# EAGLE board WS2812B-Breakout-Panel-v11 (EAGLE 6.6.0), part 1 of 2
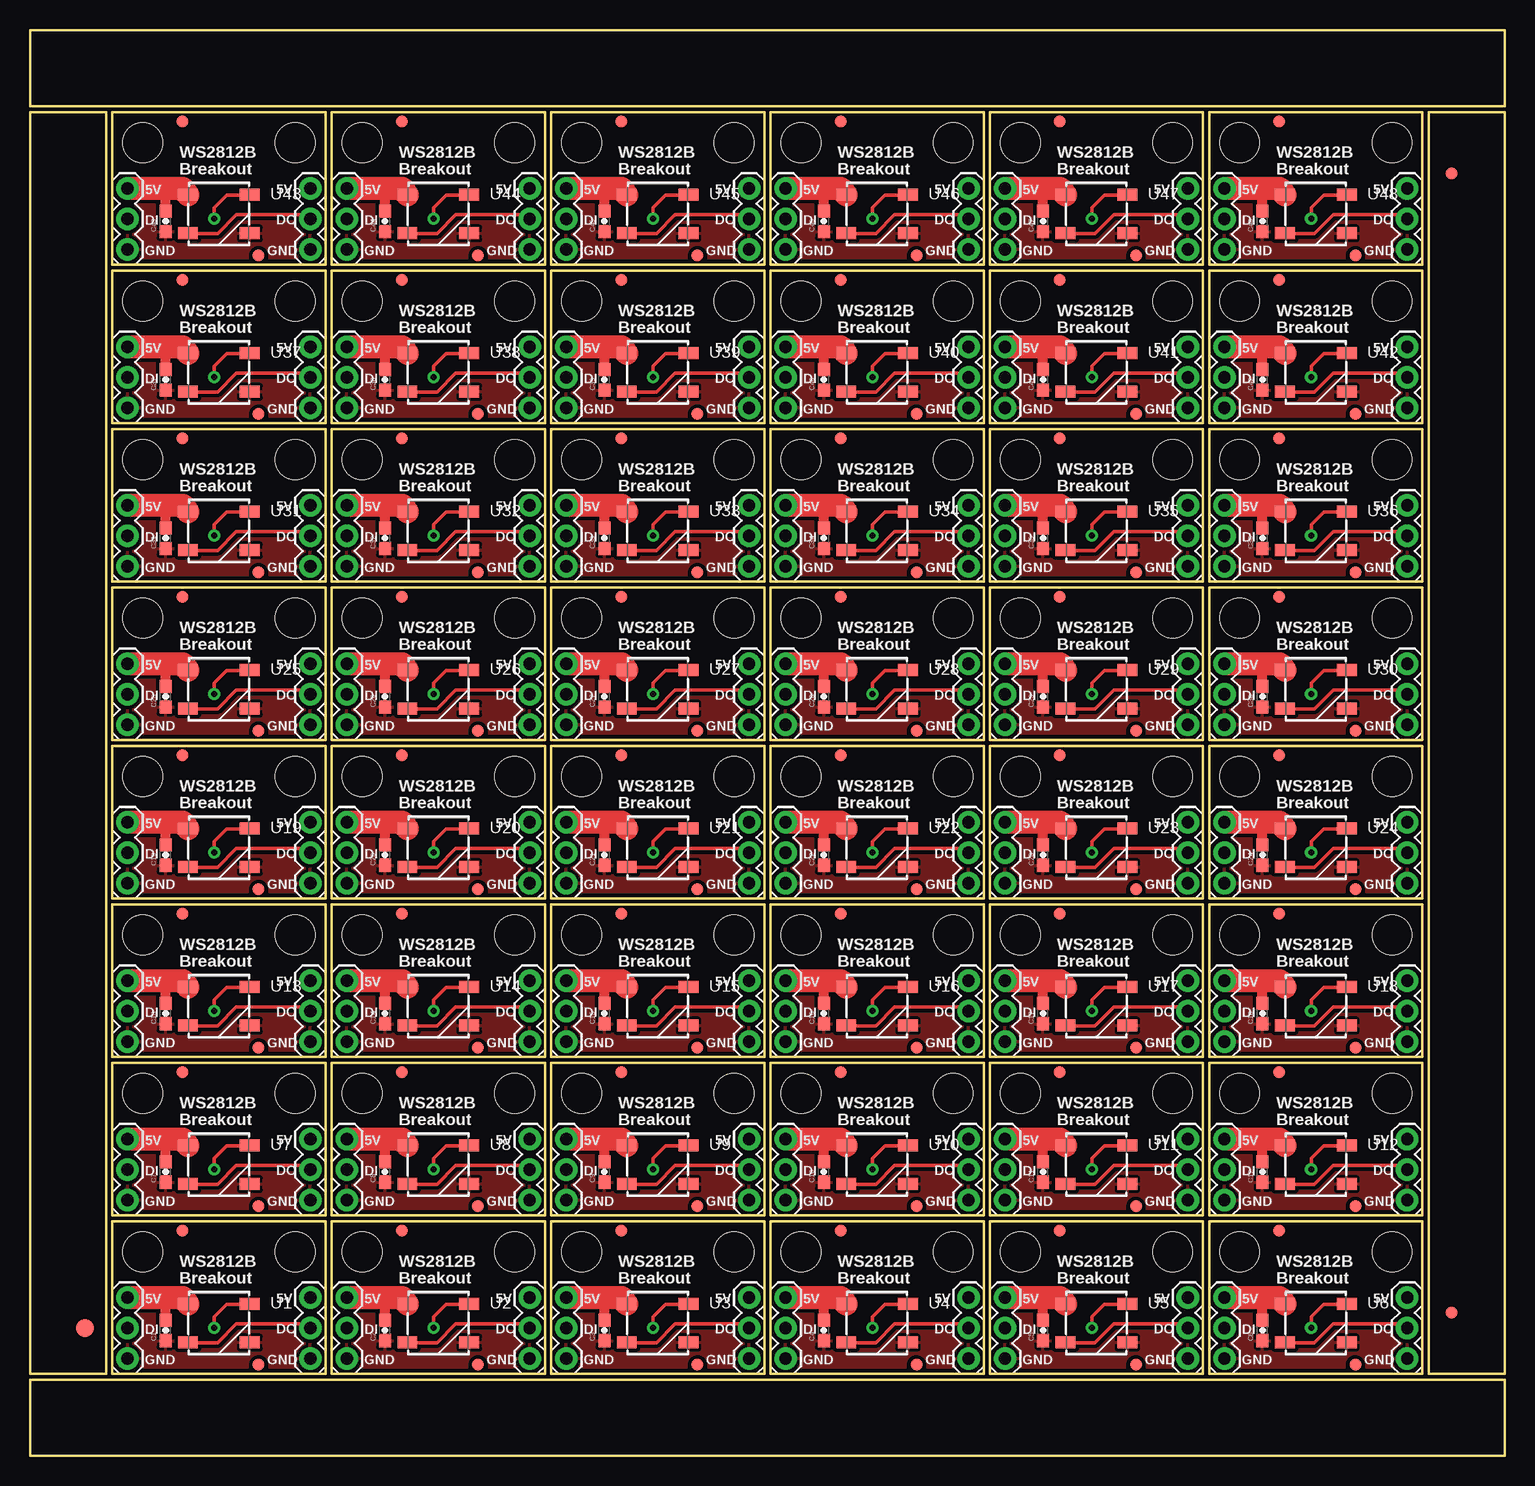
[diagram p0: board, top side]
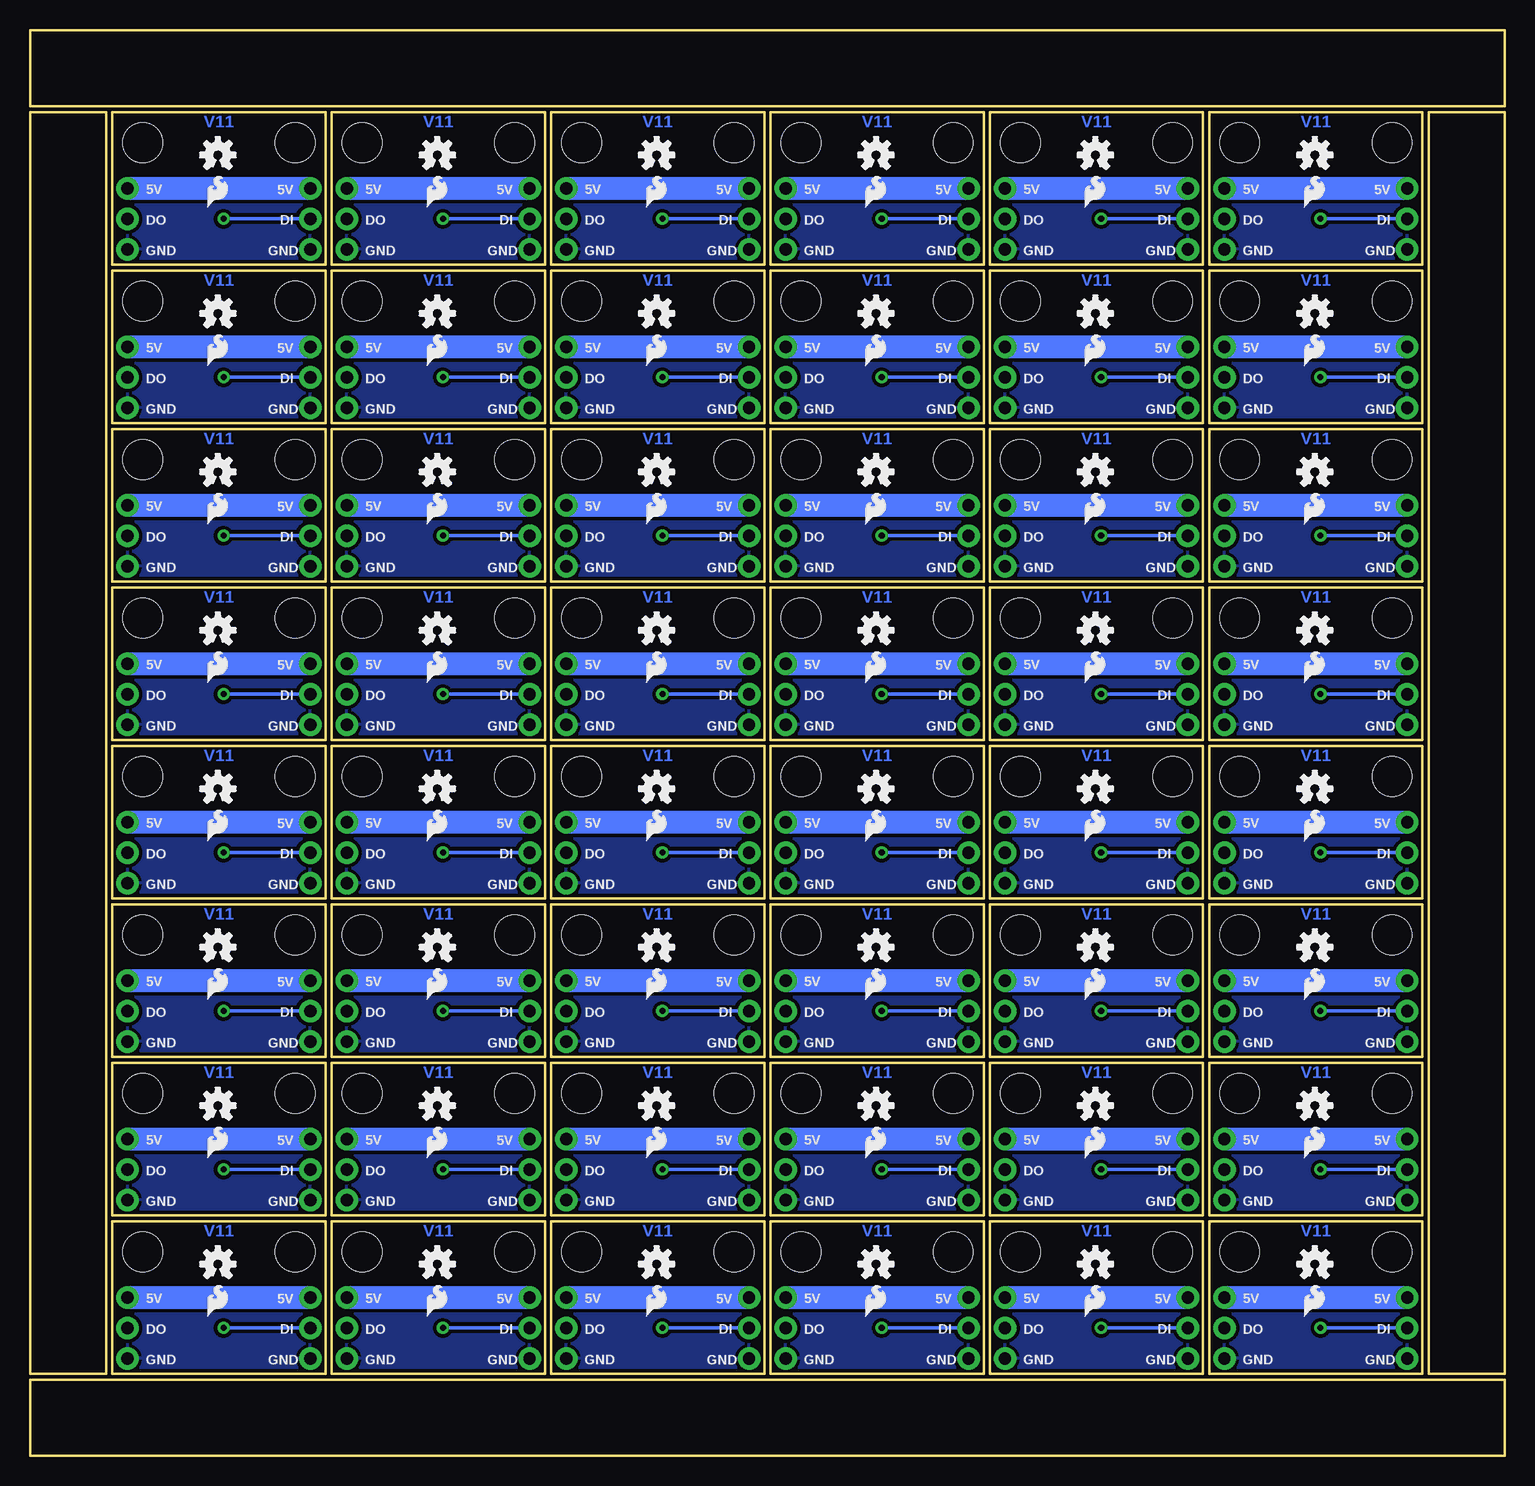
[diagram p1: board, bottom side, seen from below]

Size 122.94 x 118.87 mm. Coordinates in mm from the lower left corner, seen from the top.
Outline: 6.86,6.86 6.86,19.56 24.64,19.56 24.64,6.86 6.86,6.86
Outline: 25.15,6.86 25.15,19.56 42.93,19.56 42.93,6.86 25.15,6.86
Outline: 43.43,6.86 43.43,19.56 61.21,19.56 61.21,6.86 43.43,6.86
Outline: 61.72,6.86 61.72,19.56 79.5,19.56 79.5,6.86 61.72,6.86
Outline: 80.01,6.86 80.01,19.56 97.79,19.56 97.79,6.86 80.01,6.86
Outline: 98.3,6.86 98.3,19.56 116.08,19.56 116.08,6.86 98.3,6.86
Outline: 6.86,20.07 6.86,32.77 24.64,32.77 24.64,20.07 6.86,20.07
Outline: 25.15,20.07 25.15,32.77 42.93,32.77 42.93,20.07 25.15,20.07
Outline: 43.43,20.07 43.43,32.77 61.21,32.77 61.21,20.07 43.43,20.07
Outline: 61.72,20.07 61.72,32.77 79.5,32.77 79.5,20.07 61.72,20.07
Outline: 80.01,20.07 80.01,32.77 97.79,32.77 97.79,20.07 80.01,20.07
Outline: 98.3,20.07 98.3,32.77 116.08,32.77 116.08,20.07 98.3,20.07
Outline: 6.86,33.27 6.86,45.97 24.64,45.97 24.64,33.27 6.86,33.27
Outline: 25.15,33.27 25.15,45.97 42.93,45.97 42.93,33.27 25.15,33.27
Outline: 43.43,33.27 43.43,45.97 61.21,45.97 61.21,33.27 43.43,33.27
Outline: 61.72,33.27 61.72,45.97 79.5,45.97 79.5,33.27 61.72,33.27
Outline: 80.01,33.27 80.01,45.97 97.79,45.97 97.79,33.27 80.01,33.27
Outline: 98.3,33.27 98.3,45.97 116.08,45.97 116.08,33.27 98.3,33.27
Outline: 6.86,46.48 6.86,59.18 24.64,59.18 24.64,46.48 6.86,46.48
Outline: 25.15,46.48 25.15,59.18 42.93,59.18 42.93,46.48 25.15,46.48
Outline: 43.43,46.48 43.43,59.18 61.21,59.18 61.21,46.48 43.43,46.48
Outline: 61.72,46.48 61.72,59.18 79.5,59.18 79.5,46.48 61.72,46.48
Outline: 80.01,46.48 80.01,59.18 97.79,59.18 97.79,46.48 80.01,46.48
Outline: 98.3,46.48 98.3,59.18 116.08,59.18 116.08,46.48 98.3,46.48
Outline: 6.86,59.69 6.86,72.39 24.64,72.39 24.64,59.69 6.86,59.69
Outline: 25.15,59.69 25.15,72.39 42.93,72.39 42.93,59.69 25.15,59.69
Outline: 43.43,59.69 43.43,72.39 61.21,72.39 61.21,59.69 43.43,59.69
Outline: 61.72,59.69 61.72,72.39 79.5,72.39 79.5,59.69 61.72,59.69
Outline: 80.01,59.69 80.01,72.39 97.79,72.39 97.79,59.69 80.01,59.69
Outline: 98.3,59.69 98.3,72.39 116.08,72.39 116.08,59.69 98.3,59.69
Outline: 6.86,72.9 6.86,85.6 24.64,85.6 24.64,72.9 6.86,72.9
Outline: 25.15,72.9 25.15,85.6 42.93,85.6 42.93,72.9 25.15,72.9
Outline: 43.43,72.9 43.43,85.6 61.21,85.6 61.21,72.9 43.43,72.9
Outline: 61.72,72.9 61.72,85.6 79.5,85.6 79.5,72.9 61.72,72.9
Outline: 80.01,72.9 80.01,85.6 97.79,85.6 97.79,72.9 80.01,72.9
Outline: 98.3,72.9 98.3,85.6 116.08,85.6 116.08,72.9 98.3,72.9
Outline: 6.86,86.11 6.86,98.81 24.64,98.81 24.64,86.11 6.86,86.11
Outline: 25.15,86.11 25.15,98.81 42.93,98.81 42.93,86.11 25.15,86.11
Outline: 43.43,86.11 43.43,98.81 61.21,98.81 61.21,86.11 43.43,86.11
Outline: 61.72,86.11 61.72,98.81 79.5,98.81 79.5,86.11 61.72,86.11
Outline: 80.01,86.11 80.01,98.81 97.79,98.81 97.79,86.11 80.01,86.11
Outline: 98.3,86.11 98.3,98.81 116.08,98.81 116.08,86.11 98.3,86.11
Outline: 6.86,99.31 6.86,112.01 24.64,112.01 24.64,99.31 6.86,99.31
Outline: 25.15,99.31 25.15,112.01 42.93,112.01 42.93,99.31 25.15,99.31
Outline: 43.43,99.31 43.43,112.01 61.21,112.01 61.21,99.31 43.43,99.31
Outline: 61.72,99.31 61.72,112.01 79.5,112.01 79.5,99.31 61.72,99.31
Outline: 80.01,99.31 80.01,112.01 97.79,112.01 97.79,99.31 80.01,99.31
Outline: 98.3,99.31 98.3,112.01 116.08,112.01 116.08,99.31 98.3,99.31
Outline: 6.35,6.86 6.35,112.01 0,112.01 0,6.86 6.35,6.86
Outline: 0,0 122.94,0 122.94,6.35 0,6.35 0,0
Outline: 122.94,6.86 122.94,112.01 116.59,112.01 116.59,6.86 122.94,6.86
Outline: 122.94,118.87 0,118.87 0,112.52 122.94,112.52 122.94,118.87
Copper layers (1*16): Top 0.035mm / dielectric 1.5mm / Bottom 0.035mm
Design rules "SparkFun-2-layer": minimum track width 7mil, minimum drill 15mil, track to track 8mil, track to pad 8mil, pad to pad 8mil, via to via 8mil, smd to smd 8mil, copper to edge 8mil, drill to drill 8mil, minimum pad ring 12mil, minimum via ring 10mil, stop-mask expansion 4mil, vias tented up to drill 20mil, thermal gap 10mil

## Footprints (pad centres in the part's own frame; a part is rotated, then mirrored left to right if it is on the bottom)
0603-CAP = smd 1.1 x 1: 1 -0.85,0; 2 0.85,0
FIDUCIAL-1.5X3 = smd 1.5 x 1.5: 1 0,0
FIDUCIAL-1X2 = smd 1 x 1: 1 0,0
1X03 = drill 1.016 pad 1.88: 1 0,0; 2 2.54,0; 3 5.08,0
STAND-OFF = hole 3.302: 0,0
WS2812B = smd 1.651 x 1: 1 -2.577,1.6; 2 -2.577,-1.6; 3 2.577,-1.6; 4 2.577,1.6

## Placement (x,y rotation side)
C1  0.1uF  [0603-CAP]  11.3,10.46 90 top
C2  0.1uF  [0603-CAP]  29.59,10.46 90 top
C3  0.1uF  [0603-CAP]  47.88,10.46 90 top
C4  0.1uF  [0603-CAP]  66.17,10.46 90 top
C5  0.1uF  [0603-CAP]  84.45,10.46 90 top
C6  0.1uF  [0603-CAP]  102.74,10.46 90 top
C7  0.1uF  [0603-CAP]  11.3,23.67 90 top
C8  0.1uF  [0603-CAP]  29.59,23.67 90 top
C9  0.1uF  [0603-CAP]  47.88,23.67 90 top
C10  0.1uF  [0603-CAP]  66.17,23.67 90 top
C11  0.1uF  [0603-CAP]  84.45,23.67 90 top
C12  0.1uF  [0603-CAP]  102.74,23.67 90 top
C13  0.1uF  [0603-CAP]  11.3,36.88 90 top
C14  0.1uF  [0603-CAP]  29.59,36.88 90 top
C15  0.1uF  [0603-CAP]  47.88,36.88 90 top
C16  0.1uF  [0603-CAP]  66.17,36.88 90 top
C17  0.1uF  [0603-CAP]  84.45,36.88 90 top
C18  0.1uF  [0603-CAP]  102.74,36.88 90 top
C19  0.1uF  [0603-CAP]  11.3,50.09 90 top
C20  0.1uF  [0603-CAP]  29.59,50.09 90 top
C21  0.1uF  [0603-CAP]  47.88,50.09 90 top
C22  0.1uF  [0603-CAP]  66.17,50.09 90 top
C23  0.1uF  [0603-CAP]  84.45,50.09 90 top
C24  0.1uF  [0603-CAP]  102.74,50.09 90 top
C25  0.1uF  [0603-CAP]  11.3,63.3 90 top
C26  0.1uF  [0603-CAP]  29.59,63.3 90 top
C27  0.1uF  [0603-CAP]  47.88,63.3 90 top
C28  0.1uF  [0603-CAP]  66.17,63.3 90 top
C29  0.1uF  [0603-CAP]  84.45,63.3 90 top
C30  0.1uF  [0603-CAP]  102.74,63.3 90 top
C31  0.1uF  [0603-CAP]  11.3,76.5 90 top
C32  0.1uF  [0603-CAP]  29.59,76.5 90 top
C33  0.1uF  [0603-CAP]  47.88,76.5 90 top
C34  0.1uF  [0603-CAP]  66.17,76.5 90 top
C35  0.1uF  [0603-CAP]  84.45,76.5 90 top
C36  0.1uF  [0603-CAP]  102.74,76.5 90 top
C37  0.1uF  [0603-CAP]  11.3,89.71 90 top
C38  0.1uF  [0603-CAP]  29.59,89.71 90 top
C39  0.1uF  [0603-CAP]  47.88,89.71 90 top
C40  0.1uF  [0603-CAP]  66.17,89.71 90 top
C41  0.1uF  [0603-CAP]  84.45,89.71 90 top
C42  0.1uF  [0603-CAP]  102.74,89.71 90 top
C43  0.1uF  [0603-CAP]  11.3,102.92 90 top
C44  0.1uF  [0603-CAP]  29.59,102.92 90 top
C45  0.1uF  [0603-CAP]  47.88,102.92 90 top
C46  0.1uF  [0603-CAP]  66.17,102.92 90 top
C47  0.1uF  [0603-CAP]  84.45,102.92 90 top
C48  0.1uF  [0603-CAP]  102.74,102.92 90 top
E$1  [FIDUCIAL-1.5X3]  4.57,10.67 0 top
E$4  [FIDUCIAL-1X2]  118.49,11.94 0 top
E$5  [FIDUCIAL-1X2]  118.49,106.93 180 top
FID1  FIDUCIAL1X2  [FIDUCIAL-1X2]  12.7,18.8 0 top
FID2  FIDUCIAL1X2  [FIDUCIAL-1X2]  19.05,7.62 0 top
FID3  FIDUCIAL1X2  [FIDUCIAL-1X2]  30.99,18.8 0 top
FID4  FIDUCIAL1X2  [FIDUCIAL-1X2]  37.34,7.62 0 top
FID5  FIDUCIAL1X2  [FIDUCIAL-1X2]  49.28,18.8 0 top
FID6  FIDUCIAL1X2  [FIDUCIAL-1X2]  55.63,7.62 0 top
FID7  FIDUCIAL1X2  [FIDUCIAL-1X2]  67.56,18.8 0 top
FID8  FIDUCIAL1X2  [FIDUCIAL-1X2]  73.91,7.62 0 top
FID9  FIDUCIAL1X2  [FIDUCIAL-1X2]  85.85,18.8 0 top
FID10  FIDUCIAL1X2  [FIDUCIAL-1X2]  92.2,7.62 0 top
FID11  FIDUCIAL1X2  [FIDUCIAL-1X2]  104.14,18.8 0 top
FID12  FIDUCIAL1X2  [FIDUCIAL-1X2]  110.49,7.62 0 top
FID13  FIDUCIAL1X2  [FIDUCIAL-1X2]  12.7,32 0 top
FID14  FIDUCIAL1X2  [FIDUCIAL-1X2]  19.05,20.83 0 top
FID15  FIDUCIAL1X2  [FIDUCIAL-1X2]  30.99,32 0 top
FID16  FIDUCIAL1X2  [FIDUCIAL-1X2]  37.34,20.83 0 top
FID17  FIDUCIAL1X2  [FIDUCIAL-1X2]  49.28,32 0 top
FID18  FIDUCIAL1X2  [FIDUCIAL-1X2]  55.63,20.83 0 top
FID19  FIDUCIAL1X2  [FIDUCIAL-1X2]  67.56,32 0 top
FID20  FIDUCIAL1X2  [FIDUCIAL-1X2]  73.91,20.83 0 top
FID21  FIDUCIAL1X2  [FIDUCIAL-1X2]  85.85,32 0 top
FID22  FIDUCIAL1X2  [FIDUCIAL-1X2]  92.2,20.83 0 top
FID23  FIDUCIAL1X2  [FIDUCIAL-1X2]  104.14,32 0 top
FID24  FIDUCIAL1X2  [FIDUCIAL-1X2]  110.49,20.83 0 top
FID25  FIDUCIAL1X2  [FIDUCIAL-1X2]  12.7,45.21 0 top
FID26  FIDUCIAL1X2  [FIDUCIAL-1X2]  19.05,34.04 0 top
FID27  FIDUCIAL1X2  [FIDUCIAL-1X2]  30.99,45.21 0 top
FID28  FIDUCIAL1X2  [FIDUCIAL-1X2]  37.34,34.04 0 top
FID29  FIDUCIAL1X2  [FIDUCIAL-1X2]  49.28,45.21 0 top
FID30  FIDUCIAL1X2  [FIDUCIAL-1X2]  55.63,34.04 0 top
FID31  FIDUCIAL1X2  [FIDUCIAL-1X2]  67.56,45.21 0 top
FID32  FIDUCIAL1X2  [FIDUCIAL-1X2]  73.91,34.04 0 top
FID33  FIDUCIAL1X2  [FIDUCIAL-1X2]  85.85,45.21 0 top
FID34  FIDUCIAL1X2  [FIDUCIAL-1X2]  92.2,34.04 0 top
FID35  FIDUCIAL1X2  [FIDUCIAL-1X2]  104.14,45.21 0 top
FID36  FIDUCIAL1X2  [FIDUCIAL-1X2]  110.49,34.04 0 top
FID37  FIDUCIAL1X2  [FIDUCIAL-1X2]  12.7,58.42 0 top
FID38  FIDUCIAL1X2  [FIDUCIAL-1X2]  19.05,47.24 0 top
FID39  FIDUCIAL1X2  [FIDUCIAL-1X2]  30.99,58.42 0 top
FID40  FIDUCIAL1X2  [FIDUCIAL-1X2]  37.34,47.24 0 top
FID41  FIDUCIAL1X2  [FIDUCIAL-1X2]  49.28,58.42 0 top
FID42  FIDUCIAL1X2  [FIDUCIAL-1X2]  55.63,47.24 0 top
FID43  FIDUCIAL1X2  [FIDUCIAL-1X2]  67.56,58.42 0 top
FID44  FIDUCIAL1X2  [FIDUCIAL-1X2]  73.91,47.24 0 top
FID45  FIDUCIAL1X2  [FIDUCIAL-1X2]  85.85,58.42 0 top
FID46  FIDUCIAL1X2  [FIDUCIAL-1X2]  92.2,47.24 0 top
FID47  FIDUCIAL1X2  [FIDUCIAL-1X2]  104.14,58.42 0 top
FID48  FIDUCIAL1X2  [FIDUCIAL-1X2]  110.49,47.24 0 top
FID49  FIDUCIAL1X2  [FIDUCIAL-1X2]  12.7,71.63 0 top
FID50  FIDUCIAL1X2  [FIDUCIAL-1X2]  19.05,60.45 0 top
FID51  FIDUCIAL1X2  [FIDUCIAL-1X2]  30.99,71.63 0 top
FID52  FIDUCIAL1X2  [FIDUCIAL-1X2]  37.34,60.45 0 top
FID53  FIDUCIAL1X2  [FIDUCIAL-1X2]  49.28,71.63 0 top
FID54  FIDUCIAL1X2  [FIDUCIAL-1X2]  55.63,60.45 0 top
FID55  FIDUCIAL1X2  [FIDUCIAL-1X2]  67.56,71.63 0 top
FID56  FIDUCIAL1X2  [FIDUCIAL-1X2]  73.91,60.45 0 top
FID57  FIDUCIAL1X2  [FIDUCIAL-1X2]  85.85,71.63 0 top
FID58  FIDUCIAL1X2  [FIDUCIAL-1X2]  92.2,60.45 0 top
FID59  FIDUCIAL1X2  [FIDUCIAL-1X2]  104.14,71.63 0 top
FID60  FIDUCIAL1X2  [FIDUCIAL-1X2]  110.49,60.45 0 top
FID61  FIDUCIAL1X2  [FIDUCIAL-1X2]  12.7,84.84 0 top
FID62  FIDUCIAL1X2  [FIDUCIAL-1X2]  19.05,73.66 0 top
FID63  FIDUCIAL1X2  [FIDUCIAL-1X2]  30.99,84.84 0 top
FID64  FIDUCIAL1X2  [FIDUCIAL-1X2]  37.34,73.66 0 top
FID65  FIDUCIAL1X2  [FIDUCIAL-1X2]  49.28,84.84 0 top
FID66  FIDUCIAL1X2  [FIDUCIAL-1X2]  55.63,73.66 0 top
FID67  FIDUCIAL1X2  [FIDUCIAL-1X2]  67.56,84.84 0 top
FID68  FIDUCIAL1X2  [FIDUCIAL-1X2]  73.91,73.66 0 top
FID69  FIDUCIAL1X2  [FIDUCIAL-1X2]  85.85,84.84 0 top
FID70  FIDUCIAL1X2  [FIDUCIAL-1X2]  92.2,73.66 0 top
FID71  FIDUCIAL1X2  [FIDUCIAL-1X2]  104.14,84.84 0 top
FID72  FIDUCIAL1X2  [FIDUCIAL-1X2]  110.49,73.66 0 top
FID73  FIDUCIAL1X2  [FIDUCIAL-1X2]  12.7,98.04 0 top
FID74  FIDUCIAL1X2  [FIDUCIAL-1X2]  19.05,86.87 0 top
FID75  FIDUCIAL1X2  [FIDUCIAL-1X2]  30.99,98.04 0 top
FID76  FIDUCIAL1X2  [FIDUCIAL-1X2]  37.34,86.87 0 top
FID77  FIDUCIAL1X2  [FIDUCIAL-1X2]  49.28,98.04 0 top
FID78  FIDUCIAL1X2  [FIDUCIAL-1X2]  55.63,86.87 0 top
FID79  FIDUCIAL1X2  [FIDUCIAL-1X2]  67.56,98.04 0 top
FID80  FIDUCIAL1X2  [FIDUCIAL-1X2]  73.91,86.87 0 top
FID81  FIDUCIAL1X2  [FIDUCIAL-1X2]  85.85,98.04 0 top
FID82  FIDUCIAL1X2  [FIDUCIAL-1X2]  92.2,86.87 0 top
FID83  FIDUCIAL1X2  [FIDUCIAL-1X2]  104.14,98.04 0 top
FID84  FIDUCIAL1X2  [FIDUCIAL-1X2]  110.49,86.87 0 top
FID85  FIDUCIAL1X2  [FIDUCIAL-1X2]  12.7,111.25 0 top
FID86  FIDUCIAL1X2  [FIDUCIAL-1X2]  19.05,100.08 0 top
FID87  FIDUCIAL1X2  [FIDUCIAL-1X2]  30.99,111.25 0 top
FID88  FIDUCIAL1X2  [FIDUCIAL-1X2]  37.34,100.08 0 top
FID89  FIDUCIAL1X2  [FIDUCIAL-1X2]  49.28,111.25 0 top
FID90  FIDUCIAL1X2  [FIDUCIAL-1X2]  55.63,100.08 0 top
FID91  FIDUCIAL1X2  [FIDUCIAL-1X2]  67.56,111.25 0 top
FID92  FIDUCIAL1X2  [FIDUCIAL-1X2]  73.91,100.08 0 top
FID93  FIDUCIAL1X2  [FIDUCIAL-1X2]  85.85,111.25 0 top
FID94  FIDUCIAL1X2  [FIDUCIAL-1X2]  92.2,100.08 0 top
FID95  FIDUCIAL1X2  [FIDUCIAL-1X2]  104.14,111.25 0 top
FID96  FIDUCIAL1X2  [FIDUCIAL-1X2]  110.49,100.08 0 top
JP1  INPUT  [1X03]  8.13,8.13 90 top
JP2  OUTPUT  [1X03]  23.37,8.13 90 top
JP3  STAND-OFF  [STAND-OFF]  40.39,17.02 0 top
JP4  STAND-OFF  [STAND-OFF]  9.4,17.02 0 top
JP5  STAND-OFF  [STAND-OFF]  27.69,17.02 0 top
JP6  INPUT  [1X03]  26.42,8.13 90 top
JP7  OUTPUT  [1X03]  41.66,8.13 90 top
JP8  STAND-OFF  [STAND-OFF]  58.67,17.02 0 top
JP9  STAND-OFF  [STAND-OFF]  45.97,17.02 0 top
JP10  INPUT  [1X03]  44.7,8.13 90 top
JP11  OUTPUT  [1X03]  59.94,8.13 90 top
JP12  STAND-OFF  [STAND-OFF]  76.96,17.02 0 top
JP13  STAND-OFF  [STAND-OFF]  64.26,17.02 0 top
JP14  INPUT  [1X03]  62.99,8.13 90 top
JP15  STAND-OFF  [STAND-OFF]  22.1,17.02 0 top
JP16  OUTPUT  [1X03]  78.23,8.13 90 top
JP17  STAND-OFF  [STAND-OFF]  95.25,17.02 0 top
JP18  STAND-OFF  [STAND-OFF]  82.55,17.02 0 top
JP19  INPUT  [1X03]  81.28,8.13 90 top
JP20  OUTPUT  [1X03]  96.52,8.13 90 top
JP21  STAND-OFF  [STAND-OFF]  113.54,17.02 0 top
JP22  STAND-OFF  [STAND-OFF]  100.84,17.02 0 top
JP23  INPUT  [1X03]  99.57,8.13 90 top
JP24  OUTPUT  [1X03]  114.81,8.13 90 top
JP25  STAND-OFF  [STAND-OFF]  22.1,30.23 0 top
JP26  STAND-OFF  [STAND-OFF]  9.4,30.23 0 top
JP27  INPUT  [1X03]  8.13,21.34 90 top
JP28  OUTPUT  [1X03]  23.37,21.34 90 top
JP29  STAND-OFF  [STAND-OFF]  40.39,30.23 0 top
JP30  STAND-OFF  [STAND-OFF]  27.69,30.23 0 top
JP31  INPUT  [1X03]  26.42,21.34 90 top
JP32  OUTPUT  [1X03]  41.66,21.34 90 top
JP33  STAND-OFF  [STAND-OFF]  58.67,30.23 0 top
JP34  STAND-OFF  [STAND-OFF]  45.97,30.23 0 top
JP35  INPUT  [1X03]  44.7,21.34 90 top
JP36  OUTPUT  [1X03]  59.94,21.34 90 top
JP37  STAND-OFF  [STAND-OFF]  76.96,30.23 0 top
JP38  STAND-OFF  [STAND-OFF]  64.26,30.23 0 top
JP39  INPUT  [1X03]  62.99,21.34 90 top
JP40  OUTPUT  [1X03]  78.23,21.34 90 top
JP41  STAND-OFF  [STAND-OFF]  95.25,30.23 0 top
JP42  STAND-OFF  [STAND-OFF]  82.55,30.23 0 top
JP43  INPUT  [1X03]  81.28,21.34 90 top
JP44  OUTPUT  [1X03]  96.52,21.34 90 top
JP45  STAND-OFF  [STAND-OFF]  113.54,30.23 0 top
JP46  STAND-OFF  [STAND-OFF]  100.84,30.23 0 top
JP47  INPUT  [1X03]  99.57,21.34 90 top
JP48  OUTPUT  [1X03]  114.81,21.34 90 top
JP49  STAND-OFF  [STAND-OFF]  22.1,43.43 0 top
JP50  STAND-OFF  [STAND-OFF]  9.4,43.43 0 top
JP51  INPUT  [1X03]  8.13,34.54 90 top
JP52  OUTPUT  [1X03]  23.37,34.54 90 top
JP53  STAND-OFF  [STAND-OFF]  40.39,43.43 0 top
JP54  STAND-OFF  [STAND-OFF]  27.69,43.43 0 top
JP55  INPUT  [1X03]  26.42,34.54 90 top
JP56  OUTPUT  [1X03]  41.66,34.54 90 top
JP57  STAND-OFF  [STAND-OFF]  58.67,43.43 0 top
JP58  STAND-OFF  [STAND-OFF]  45.97,43.43 0 top
JP59  INPUT  [1X03]  44.7,34.54 90 top
JP60  OUTPUT  [1X03]  59.94,34.54 90 top
JP61  STAND-OFF  [STAND-OFF]  76.96,43.43 0 top
JP62  STAND-OFF  [STAND-OFF]  64.26,43.43 0 top
JP63  INPUT  [1X03]  62.99,34.54 90 top
JP64  OUTPUT  [1X03]  78.23,34.54 90 top
JP65  STAND-OFF  [STAND-OFF]  95.25,43.43 0 top
JP66  STAND-OFF  [STAND-OFF]  82.55,43.43 0 top
JP67  INPUT  [1X03]  81.28,34.54 90 top
JP68  OUTPUT  [1X03]  96.52,34.54 90 top
JP69  STAND-OFF  [STAND-OFF]  113.54,43.43 0 top
JP70  STAND-OFF  [STAND-OFF]  100.84,43.43 0 top
JP71  INPUT  [1X03]  99.57,34.54 90 top
JP72  OUTPUT  [1X03]  114.81,34.54 90 top
JP73  STAND-OFF  [STAND-OFF]  22.1,56.64 0 top
JP74  STAND-OFF  [STAND-OFF]  9.4,56.64 0 top
JP75  INPUT  [1X03]  8.13,47.75 90 top
JP76  OUTPUT  [1X03]  23.37,47.75 90 top
JP77  STAND-OFF  [STAND-OFF]  40.39,56.64 0 top
JP78  STAND-OFF  [STAND-OFF]  27.69,56.64 0 top
JP79  INPUT  [1X03]  26.42,47.75 90 top
JP80  OUTPUT  [1X03]  41.66,47.75 90 top
JP81  STAND-OFF  [STAND-OFF]  58.67,56.64 0 top
JP82  STAND-OFF  [STAND-OFF]  45.97,56.64 0 top
JP83  INPUT  [1X03]  44.7,47.75 90 top
JP84  OUTPUT  [1X03]  59.94,47.75 90 top
JP85  STAND-OFF  [STAND-OFF]  76.96,56.64 0 top
JP86  STAND-OFF  [STAND-OFF]  64.26,56.64 0 top
JP87  INPUT  [1X03]  62.99,47.75 90 top
JP88  OUTPUT  [1X03]  78.23,47.75 90 top
JP89  STAND-OFF  [STAND-OFF]  95.25,56.64 0 top
JP90  STAND-OFF  [STAND-OFF]  82.55,56.64 0 top
JP91  INPUT  [1X03]  81.28,47.75 90 top
JP92  OUTPUT  [1X03]  96.52,47.75 90 top
JP93  STAND-OFF  [STAND-OFF]  113.54,56.64 0 top
JP94  STAND-OFF  [STAND-OFF]  100.84,56.64 0 top
JP95  INPUT  [1X03]  99.57,47.75 90 top
JP96  OUTPUT  [1X03]  114.81,47.75 90 top
JP97  STAND-OFF  [STAND-OFF]  22.1,69.85 0 top
JP98  STAND-OFF  [STAND-OFF]  9.4,69.85 0 top
JP99  INPUT  [1X03]  8.13,60.96 90 top
JP100  OUTPUT  [1X03]  23.37,60.96 90 top
JP101  STAND-OFF  [STAND-OFF]  40.39,69.85 0 top
JP102  STAND-OFF  [STAND-OFF]  27.69,69.85 0 top
JP103  INPUT  [1X03]  26.42,60.96 90 top
JP104  OUTPUT  [1X03]  41.66,60.96 90 top
JP105  STAND-OFF  [STAND-OFF]  58.67,69.85 0 top
JP106  STAND-OFF  [STAND-OFF]  45.97,69.85 0 top
JP107  INPUT  [1X03]  44.7,60.96 90 top
JP108  OUTPUT  [1X03]  59.94,60.96 90 top
JP109  STAND-OFF  [STAND-OFF]  76.96,69.85 0 top
JP110  STAND-OFF  [STAND-OFF]  64.26,69.85 0 top
JP111  INPUT  [1X03]  62.99,60.96 90 top
JP112  OUTPUT  [1X03]  78.23,60.96 90 top
JP113  STAND-OFF  [STAND-OFF]  95.25,69.85 0 top
JP114  STAND-OFF  [STAND-OFF]  82.55,69.85 0 top
JP115  INPUT  [1X03]  81.28,60.96 90 top
JP116  OUTPUT  [1X03]  96.52,60.96 90 top
JP117  STAND-OFF  [STAND-OFF]  113.54,69.85 0 top
JP118  STAND-OFF  [STAND-OFF]  100.84,69.85 0 top
JP119  INPUT  [1X03]  99.57,60.96 90 top
JP120  OUTPUT  [1X03]  114.81,60.96 90 top
JP121  STAND-OFF  [STAND-OFF]  22.1,83.06 0 top
JP122  STAND-OFF  [STAND-OFF]  9.4,83.06 0 top
JP123  INPUT  [1X03]  8.13,74.17 90 top
JP124  OUTPUT  [1X03]  23.37,74.17 90 top
JP125  STAND-OFF  [STAND-OFF]  40.39,83.06 0 top
JP126  STAND-OFF  [STAND-OFF]  27.69,83.06 0 top
JP127  INPUT  [1X03]  26.42,74.17 90 top
JP128  OUTPUT  [1X03]  41.66,74.17 90 top
JP129  STAND-OFF  [STAND-OFF]  58.67,83.06 0 top
JP130  STAND-OFF  [STAND-OFF]  45.97,83.06 0 top
JP131  INPUT  [1X03]  44.7,74.17 90 top
JP132  OUTPUT  [1X03]  59.94,74.17 90 top
JP133  STAND-OFF  [STAND-OFF]  76.96,83.06 0 top
JP134  STAND-OFF  [STAND-OFF]  64.26,83.06 0 top
JP135  INPUT  [1X03]  62.99,74.17 90 top
JP136  OUTPUT  [1X03]  78.23,74.17 90 top
JP137  STAND-OFF  [STAND-OFF]  95.25,83.06 0 top
JP138  STAND-OFF  [STAND-OFF]  82.55,83.06 0 top
JP139  INPUT  [1X03]  81.28,74.17 90 top
JP140  OUTPUT  [1X03]  96.52,74.17 90 top
JP141  STAND-OFF  [STAND-OFF]  113.54,83.06 0 top
JP142  STAND-OFF  [STAND-OFF]  100.84,83.06 0 top
JP143  INPUT  [1X03]  99.57,74.17 90 top
JP144  OUTPUT  [1X03]  114.81,74.17 90 top
JP145  STAND-OFF  [STAND-OFF]  22.1,96.27 0 top
JP146  STAND-OFF  [STAND-OFF]  9.4,96.27 0 top
JP147  INPUT  [1X03]  8.13,87.38 90 top
JP148  OUTPUT  [1X03]  23.37,87.38 90 top
JP149  STAND-OFF  [STAND-OFF]  40.39,96.27 0 top
JP150  STAND-OFF  [STAND-OFF]  27.69,96.27 0 top
JP151  INPUT  [1X03]  26.42,87.38 90 top
JP152  OUTPUT  [1X03]  41.66,87.38 90 top
JP153  STAND-OFF  [STAND-OFF]  58.67,96.27 0 top
JP154  STAND-OFF  [STAND-OFF]  45.97,96.27 0 top
JP155  INPUT  [1X03]  44.7,87.38 90 top
JP156  OUTPUT  [1X03]  59.94,87.38 90 top
JP157  STAND-OFF  [STAND-OFF]  76.96,96.27 0 top
JP158  STAND-OFF  [STAND-OFF]  64.26,96.27 0 top
JP159  INPUT  [1X03]  62.99,87.38 90 top
JP160  OUTPUT  [1X03]  78.23,87.38 90 top
JP161  STAND-OFF  [STAND-OFF]  95.25,96.27 0 top
JP162  STAND-OFF  [STAND-OFF]  82.55,96.27 0 top
JP163  INPUT  [1X03]  81.28,87.38 90 top
JP164  OUTPUT  [1X03]  96.52,87.38 90 top
JP165  STAND-OFF  [STAND-OFF]  113.54,96.27 0 top
JP166  STAND-OFF  [STAND-OFF]  100.84,96.27 0 top
JP167  INPUT  [1X03]  99.57,87.38 90 top
JP168  OUTPUT  [1X03]  114.81,87.38 90 top
JP169  STAND-OFF  [STAND-OFF]  22.1,109.47 0 top
JP170  STAND-OFF  [STAND-OFF]  9.4,109.47 0 top
JP171  INPUT  [1X03]  8.13,100.58 90 top
JP172  OUTPUT  [1X03]  23.37,100.58 90 top
JP173  STAND-OFF  [STAND-OFF]  40.39,109.47 0 top
JP174  STAND-OFF  [STAND-OFF]  27.69,109.47 0 top
JP175  INPUT  [1X03]  26.42,100.58 90 top
JP176  OUTPUT  [1X03]  41.66,100.58 90 top
JP177  STAND-OFF  [STAND-OFF]  58.67,109.47 0 top
JP178  STAND-OFF  [STAND-OFF]  45.97,109.47 0 top
JP179  INPUT  [1X03]  44.7,100.58 90 top
JP180  OUTPUT  [1X03]  59.94,100.58 90 top
JP181  STAND-OFF  [STAND-OFF]  76.96,109.47 0 top
JP182  STAND-OFF  [STAND-OFF]  64.26,109.47 0 top
JP183  INPUT  [1X03]  62.99,100.58 90 top
JP184  OUTPUT  [1X03]  78.23,100.58 90 top
JP185  STAND-OFF  [STAND-OFF]  95.25,109.47 0 top
JP186  STAND-OFF  [STAND-OFF]  82.55,109.47 0 top
JP187  INPUT  [1X03]  81.28,100.58 90 top
JP188  OUTPUT  [1X03]  96.52,100.58 90 top
JP189  STAND-OFF  [STAND-OFF]  113.54,109.47 0 top
JP190  STAND-OFF  [STAND-OFF]  100.84,109.47 0 top
JP191  INPUT  [1X03]  99.57,100.58 90 top
JP192  OUTPUT  [1X03]  114.81,100.58 90 top
LOGO1  OSHW-LOGOS  [OSHW-LOGO-S]  15.83,15.99 0 bottom
LOGO2  SFE_LOGO_FLAME.1_INCH  [SFE_LOGO_FLAME_.1]  17.02,11.3 0 bottom
LOGO3  OSHW-LOGOS  [OSHW-LOGO-S]  34.12,15.99 0 bottom
LOGO4  SFE_LOGO_FLAME.1_INCH  [SFE_LOGO_FLAME_.1]  35.3,11.3 0 bottom
LOGO5  OSHW-LOGOS  [OSHW-LOGO-S]  52.41,15.99 0 bottom
LOGO6  SFE_LOGO_FLAME.1_INCH  [SFE_LOGO_FLAME_.1]  53.59,11.3 0 bottom
LOGO7  OSHW-LOGOS  [OSHW-LOGO-S]  70.7,15.99 0 bottom
LOGO8  SFE_LOGO_FLAME.1_INCH  [SFE_LOGO_FLAME_.1]  71.88,11.3 0 bottom
LOGO9  OSHW-LOGOS  [OSHW-LOGO-S]  88.99,15.99 0 bottom
LOGO10  SFE_LOGO_FLAME.1_INCH  [SFE_LOGO_FLAME_.1]  90.17,11.3 0 bottom
LOGO11  OSHW-LOGOS  [OSHW-LOGO-S]  107.27,15.99 0 bottom
LOGO12  SFE_LOGO_FLAME.1_INCH  [SFE_LOGO_FLAME_.1]  108.46,11.3 0 bottom
LOGO13  OSHW-LOGOS  [OSHW-LOGO-S]  15.83,29.2 0 bottom
LOGO14  SFE_LOGO_FLAME.1_INCH  [SFE_LOGO_FLAME_.1]  17.02,24.51 0 bottom
LOGO15  OSHW-LOGOS  [OSHW-LOGO-S]  34.12,29.2 0 bottom
LOGO16  SFE_LOGO_FLAME.1_INCH  [SFE_LOGO_FLAME_.1]  35.3,24.51 0 bottom
LOGO17  OSHW-LOGOS  [OSHW-LOGO-S]  52.41,29.2 0 bottom
LOGO18  SFE_LOGO_FLAME.1_INCH  [SFE_LOGO_FLAME_.1]  53.59,24.51 0 bottom
LOGO19  OSHW-LOGOS  [OSHW-LOGO-S]  70.7,29.2 0 bottom
LOGO20  SFE_LOGO_FLAME.1_INCH  [SFE_LOGO_FLAME_.1]  71.88,24.51 0 bottom
LOGO21  OSHW-LOGOS  [OSHW-LOGO-S]  88.99,29.2 0 bottom
LOGO22  SFE_LOGO_FLAME.1_INCH  [SFE_LOGO_FLAME_.1]  90.17,24.51 0 bottom
LOGO23  OSHW-LOGOS  [OSHW-LOGO-S]  107.27,29.2 0 bottom
LOGO24  SFE_LOGO_FLAME.1_INCH  [SFE_LOGO_FLAME_.1]  108.46,24.51 0 bottom
LOGO25  OSHW-LOGOS  [OSHW-LOGO-S]  15.83,42.41 0 bottom
LOGO26  SFE_LOGO_FLAME.1_INCH  [SFE_LOGO_FLAME_.1]  17.02,37.71 0 bottom
LOGO27  OSHW-LOGOS  [OSHW-LOGO-S]  34.12,42.41 0 bottom
LOGO28  SFE_LOGO_FLAME.1_INCH  [SFE_LOGO_FLAME_.1]  35.3,37.71 0 bottom
LOGO29  OSHW-LOGOS  [OSHW-LOGO-S]  52.41,42.41 0 bottom
LOGO30  SFE_LOGO_FLAME.1_INCH  [SFE_LOGO_FLAME_.1]  53.59,37.71 0 bottom
LOGO31  OSHW-LOGOS  [OSHW-LOGO-S]  70.7,42.41 0 bottom
LOGO32  SFE_LOGO_FLAME.1_INCH  [SFE_LOGO_FLAME_.1]  71.88,37.71 0 bottom
LOGO33  OSHW-LOGOS  [OSHW-LOGO-S]  88.99,42.41 0 bottom
LOGO34  SFE_LOGO_FLAME.1_INCH  [SFE_LOGO_FLAME_.1]  90.17,37.71 0 bottom
LOGO35  OSHW-LOGOS  [OSHW-LOGO-S]  107.27,42.41 0 bottom
LOGO36  SFE_LOGO_FLAME.1_INCH  [SFE_LOGO_FLAME_.1]  108.46,37.71 0 bottom
LOGO37  OSHW-LOGOS  [OSHW-LOGO-S]  15.83,55.62 0 bottom
LOGO38  SFE_LOGO_FLAME.1_INCH  [SFE_LOGO_FLAME_.1]  17.02,50.92 0 bottom
LOGO39  OSHW-LOGOS  [OSHW-LOGO-S]  34.12,55.62 0 bottom
LOGO40  SFE_LOGO_FLAME.1_INCH  [SFE_LOGO_FLAME_.1]  35.3,50.92 0 bottom
LOGO41  OSHW-LOGOS  [OSHW-LOGO-S]  52.41,55.62 0 bottom
LOGO42  SFE_LOGO_FLAME.1_INCH  [SFE_LOGO_FLAME_.1]  53.59,50.92 0 bottom
LOGO43  OSHW-LOGOS  [OSHW-LOGO-S]  70.7,55.62 0 bottom
LOGO44  SFE_LOGO_FLAME.1_INCH  [SFE_LOGO_FLAME_.1]  71.88,50.92 0 bottom
LOGO45  OSHW-LOGOS  [OSHW-LOGO-S]  88.99,55.62 0 bottom
LOGO46  SFE_LOGO_FLAME.1_INCH  [SFE_LOGO_FLAME_.1]  90.17,50.92 0 bottom
LOGO47  OSHW-LOGOS  [OSHW-LOGO-S]  107.27,55.62 0 bottom
LOGO48  SFE_LOGO_FLAME.1_INCH  [SFE_LOGO_FLAME_.1]  108.46,50.92 0 bottom
LOGO49  OSHW-LOGOS  [OSHW-LOGO-S]  15.83,68.83 0 bottom
LOGO50  SFE_LOGO_FLAME.1_INCH  [SFE_LOGO_FLAME_.1]  17.02,64.13 0 bottom
LOGO51  OSHW-LOGOS  [OSHW-LOGO-S]  34.12,68.83 0 bottom
LOGO52  SFE_LOGO_FLAME.1_INCH  [SFE_LOGO_FLAME_.1]  35.3,64.13 0 bottom
LOGO53  OSHW-LOGOS  [OSHW-LOGO-S]  52.41,68.83 0 bottom
LOGO54  SFE_LOGO_FLAME.1_INCH  [SFE_LOGO_FLAME_.1]  53.59,64.13 0 bottom
LOGO55  OSHW-LOGOS  [OSHW-LOGO-S]  70.7,68.83 0 bottom
LOGO56  SFE_LOGO_FLAME.1_INCH  [SFE_LOGO_FLAME_.1]  71.88,64.13 0 bottom
LOGO57  OSHW-LOGOS  [OSHW-LOGO-S]  88.99,68.83 0 bottom
LOGO58  SFE_LOGO_FLAME.1_INCH  [SFE_LOGO_FLAME_.1]  90.17,64.13 0 bottom
LOGO59  OSHW-LOGOS  [OSHW-LOGO-S]  107.27,68.83 0 bottom
LOGO60  SFE_LOGO_FLAME.1_INCH  [SFE_LOGO_FLAME_.1]  108.46,64.13 0 bottom
LOGO61  OSHW-LOGOS  [OSHW-LOGO-S]  15.83,82.03 0 bottom
LOGO62  SFE_LOGO_FLAME.1_INCH  [SFE_LOGO_FLAME_.1]  17.02,77.34 0 bottom
LOGO63  OSHW-LOGOS  [OSHW-LOGO-S]  34.12,82.03 0 bottom
LOGO64  SFE_LOGO_FLAME.1_INCH  [SFE_LOGO_FLAME_.1]  35.3,77.34 0 bottom
LOGO65  OSHW-LOGOS  [OSHW-LOGO-S]  52.41,82.03 0 bottom
LOGO66  SFE_LOGO_FLAME.1_INCH  [SFE_LOGO_FLAME_.1]  53.59,77.34 0 bottom
LOGO67  OSHW-LOGOS  [OSHW-LOGO-S]  70.7,82.03 0 bottom
LOGO68  SFE_LOGO_FLAME.1_INCH  [SFE_LOGO_FLAME_.1]  71.88,77.34 0 bottom
LOGO69  OSHW-LOGOS  [OSHW-LOGO-S]  88.99,82.03 0 bottom
LOGO70  SFE_LOGO_FLAME.1_INCH  [SFE_LOGO_FLAME_.1]  90.17,77.34 0 bottom
LOGO71  OSHW-LOGOS  [OSHW-LOGO-S]  107.27,82.03 0 bottom
LOGO72  SFE_LOGO_FLAME.1_INCH  [SFE_LOGO_FLAME_.1]  108.46,77.34 0 bottom
LOGO73  OSHW-LOGOS  [OSHW-LOGO-S]  15.83,95.24 0 bottom
LOGO74  SFE_LOGO_FLAME.1_INCH  [SFE_LOGO_FLAME_.1]  17.02,90.55 0 bottom
LOGO75  OSHW-LOGOS  [OSHW-LOGO-S]  34.12,95.24 0 bottom
LOGO76  SFE_LOGO_FLAME.1_INCH  [SFE_LOGO_FLAME_.1]  35.3,90.55 0 bottom
LOGO77  OSHW-LOGOS  [OSHW-LOGO-S]  52.41,95.24 0 bottom
LOGO78  SFE_LOGO_FLAME.1_INCH  [SFE_LOGO_FLAME_.1]  53.59,90.55 0 bottom
LOGO79  OSHW-LOGOS  [OSHW-LOGO-S]  70.7,95.24 0 bottom
LOGO80  SFE_LOGO_FLAME.1_INCH  [SFE_LOGO_FLAME_.1]  71.88,90.55 0 bottom
LOGO81  OSHW-LOGOS  [OSHW-LOGO-S]  88.99,95.24 0 bottom
LOGO82  SFE_LOGO_FLAME.1_INCH  [SFE_LOGO_FLAME_.1]  90.17,90.55 0 bottom
LOGO83  OSHW-LOGOS  [OSHW-LOGO-S]  107.27,95.24 0 bottom
LOGO84  SFE_LOGO_FLAME.1_INCH  [SFE_LOGO_FLAME_.1]  108.46,90.55 0 bottom
LOGO85  OSHW-LOGOS  [OSHW-LOGO-S]  15.83,108.45 0 bottom
LOGO86  SFE_LOGO_FLAME.1_INCH  [SFE_LOGO_FLAME_.1]  17.02,103.75 0 bottom
LOGO87  OSHW-LOGOS  [OSHW-LOGO-S]  34.12,108.45 0 bottom
LOGO88  SFE_LOGO_FLAME.1_INCH  [SFE_LOGO_FLAME_.1]  35.3,103.75 0 bottom
LOGO89  OSHW-LOGOS  [OSHW-LOGO-S]  52.41,108.45 0 bottom
LOGO90  SFE_LOGO_FLAME.1_INCH  [SFE_LOGO_FLAME_.1]  53.59,103.75 0 bottom
LOGO91  OSHW-LOGOS  [OSHW-LOGO-S]  70.7,108.45 0 bottom
LOGO92  SFE_LOGO_FLAME.1_INCH  [SFE_LOGO_FLAME_.1]  71.88,103.75 0 bottom
LOGO93  OSHW-LOGOS  [OSHW-LOGO-S]  88.99,108.45 0 bottom
LOGO94  SFE_LOGO_FLAME.1_INCH  [SFE_LOGO_FLAME_.1]  90.17,103.75 0 bottom
LOGO95  OSHW-LOGOS  [OSHW-LOGO-S]  107.27,108.45 0 bottom
LOGO96  SFE_LOGO_FLAME.1_INCH  [SFE_LOGO_FLAME_.1]  108.46,103.75 0 bottom
U1  WS2812B  [WS2812B]  15.75,11.07 0 top
U2  WS2812B  [WS2812B]  34.04,11.07 0 top
U3  WS2812B  [WS2812B]  52.32,11.07 0 top
U4  WS2812B  [WS2812B]  70.61,11.07 0 top
U5  WS2812B  [WS2812B]  88.9,11.07 0 top
U6  WS2812B  [WS2812B]  107.19,11.07 0 top
U7  WS2812B  [WS2812B]  15.75,24.28 0 top
U8  WS2812B  [WS2812B]  34.04,24.28 0 top
U9  WS2812B  [WS2812B]  52.32,24.28 0 top
U10  WS2812B  [WS2812B]  70.61,24.28 0 top
U11  WS2812B  [WS2812B]  88.9,24.28 0 top
U12  WS2812B  [WS2812B]  107.19,24.28 0 top
U13  WS2812B  [WS2812B]  15.75,37.49 0 top
U14  WS2812B  [WS2812B]  34.04,37.49 0 top
U15  WS2812B  [WS2812B]  52.32,37.49 0 top
U16  WS2812B  [WS2812B]  70.61,37.49 0 top
U17  WS2812B  [WS2812B]  88.9,37.49 0 top
U18  WS2812B  [WS2812B]  107.19,37.49 0 top
U19  WS2812B  [WS2812B]  15.75,50.7 0 top
U20  WS2812B  [WS2812B]  34.04,50.7 0 top
U21  WS2812B  [WS2812B]  52.32,50.7 0 top
U22  WS2812B  [WS2812B]  70.61,50.7 0 top
U23  WS2812B  [WS2812B]  88.9,50.7 0 top
U24  WS2812B  [WS2812B]  107.19,50.7 0 top
U25  WS2812B  [WS2812B]  15.75,63.91 0 top
U26  WS2812B  [WS2812B]  34.04,63.91 0 top
U27  WS2812B  [WS2812B]  52.32,63.91 0 top
U28  WS2812B  [WS2812B]  70.61,63.91 0 top
U29  WS2812B  [WS2812B]  88.9,63.91 0 top
U30  WS2812B  [WS2812B]  107.19,63.91 0 top
U31  WS2812B  [WS2812B]  15.75,77.11 0 top
U32  WS2812B  [WS2812B]  34.04,77.11 0 top
U33  WS2812B  [WS2812B]  52.32,77.11 0 top
U34  WS2812B  [WS2812B]  70.61,77.11 0 top
U35  WS2812B  [WS2812B]  88.9,77.11 0 top
U36  WS2812B  [WS2812B]  107.19,77.11 0 top
U37  WS2812B  [WS2812B]  15.75,90.32 0 top
U38  WS2812B  [WS2812B]  34.04,90.32 0 top
U39  WS2812B  [WS2812B]  52.32,90.32 0 top
U40  WS2812B  [WS2812B]  70.61,90.32 0 top
U41  WS2812B  [WS2812B]  88.9,90.32 0 top
U42  WS2812B  [WS2812B]  107.19,90.32 0 top
U43  WS2812B  [WS2812B]  15.75,103.53 0 top
U44  WS2812B  [WS2812B]  34.04,103.53 0 top
U45  WS2812B  [WS2812B]  52.32,103.53 0 top
U46  WS2812B  [WS2812B]  70.61,103.53 0 top
U47  WS2812B  [WS2812B]  88.9,103.53 0 top
U48  WS2812B  [WS2812B]  107.19,103.53 0 top

## Library data of the parts
C1-C48 = SparkFun-Capacitors; PROD_ID: CAP-00810
E$1 = SparkFun-Retired
E$4 E$5 FID1-FID96 LOGO1-LOGO96 = SparkFun-Aesthetics
JP1 JP2 JP6 JP7 JP10 JP11 JP14 JP16 JP19 JP20 JP23 JP24 JP27 JP28 JP31 JP32 JP35 JP36 JP39 JP40 JP43 JP44 JP47 JP48 JP51 JP52 JP55 JP56 JP59 JP60 JP63 JP64 JP67 JP68 JP71 JP72 JP75 JP76 JP79 JP80 JP83 JP84 JP87 JP88 JP91 JP92 JP95 JP96 JP99 JP100 JP103 JP104 JP107 JP108 JP111 JP112 JP115 JP116 JP119 JP120 JP123 JP124 JP127 JP128 JP131 JP132 JP135 JP136 JP139 JP140 JP143 JP144 JP147 JP148 JP151 JP152 JP155 JP156 JP159 JP160 JP163 JP164 JP167 JP168 JP171 JP172 JP175 JP176 JP179 JP180 JP183 JP184 JP187 JP188 JP191 JP192 = SparkFun-Connectors
JP3-JP5 JP8 JP9 JP12 JP13 JP15 JP17 JP18 JP21 JP22 JP25 JP26 JP29 JP30 JP33 JP34 JP37 JP38 JP41 JP42 JP45 JP46 JP49 JP50 JP53 JP54 JP57 JP58 JP61 JP62 JP65 JP66 JP69 JP70 JP73 JP74 JP77 JP78 JP81 JP82 JP85 JP86 JP89 JP90 JP93 JP94 JP97 JP98 JP101 JP102 JP105 JP106 JP109 JP110 JP113 JP114 JP117 JP118 JP121 JP122 JP125 JP126 JP129 JP130 JP133 JP134 JP137 JP138 JP141 JP142 JP145 JP146 JP149 JP150 JP153 JP154 JP157 JP158 JP161 JP162 JP165 JP166 JP169 JP170 JP173 JP174 JP177 JP178 JP181 JP182 JP185 JP186 JP189 JP190 = SparkFun
U1-U48 = SparkFun-LED; PROD_ID: DIO-12503

## Nets
DI: JP1.2 U1.4
DI1: JP6.2 U2.4
DI2: JP10.2 U3.4
DI3: JP14.2 U4.4
DI4: JP19.2 U5.4
DI5: JP23.2 U6.4
DI6: JP27.2 U7.4
DI7: JP31.2 U8.4
DI8: JP35.2 U9.4
DI9: JP39.2 U10.4
DI10: JP43.2 U11.4
DI11: JP47.2 U12.4
DI12: JP51.2 U13.4
DI13: JP55.2 U14.4
DI14: JP59.2 U15.4
DI15: JP63.2 U16.4
DI16: JP67.2 U17.4
DI17: JP71.2 U18.4
DI18: JP75.2 U19.4
DI19: JP79.2 U20.4
DI20: JP83.2 U21.4
DI21: JP87.2 U22.4
DI22: JP91.2 U23.4
DI23: JP95.2 U24.4
DI24: JP99.2 U25.4
DI25: JP103.2 U26.4
DI26: JP107.2 U27.4
DI27: JP111.2 U28.4
DI28: JP115.2 U29.4
DI29: JP119.2 U30.4
DI30: JP123.2 U31.4
DI31: JP127.2 U32.4
DI32: JP131.2 U33.4
DI33: JP135.2 U34.4
DI34: JP139.2 U35.4
DI35: JP143.2 U36.4
DI36: JP147.2 U37.4
DI37: JP151.2 U38.4
DI38: JP155.2 U39.4
DI39: JP159.2 U40.4
DI40: JP163.2 U41.4
DI41: JP167.2 U42.4
DI42: JP171.2 U43.4
DI43: JP175.2 U44.4
DI44: JP179.2 U45.4
DI45: JP183.2 U46.4
DI46: JP187.2 U47.4
DI47: JP191.2 U48.4
DO: JP2.2 U1.2
DO1: JP7.2 U2.2
DO2: JP11.2 U3.2
DO3: JP16.2 U4.2
DO4: JP20.2 U5.2
DO5: JP24.2 U6.2
DO6: JP28.2 U7.2
DO7: JP32.2 U8.2
DO8: JP36.2 U9.2
DO9: JP40.2 U10.2
DO10: JP44.2 U11.2
DO11: JP48.2 U12.2
DO12: JP52.2 U13.2
DO13: JP56.2 U14.2
DO14: JP60.2 U15.2
DO15: JP64.2 U16.2
DO16: JP68.2 U17.2
DO17: JP72.2 U18.2
DO18: JP76.2 U19.2
DO19: JP80.2 U20.2
DO20: JP84.2 U21.2
DO21: JP88.2 U22.2
DO22: JP92.2 U23.2
DO23: JP96.2 U24.2
DO24: JP100.2 U25.2
DO25: JP104.2 U26.2
DO26: JP108.2 U27.2
DO27: JP112.2 U28.2
DO28: JP116.2 U29.2
DO29: JP120.2 U30.2
DO30: JP124.2 U31.2
DO31: JP128.2 U32.2
DO32: JP132.2 U33.2
DO33: JP136.2 U34.2
DO34: JP140.2 U35.2
DO35: JP144.2 U36.2
DO36: JP148.2 U37.2
DO37: JP152.2 U38.2
DO38: JP156.2 U39.2
DO39: JP160.2 U40.2
DO40: JP164.2 U41.2
DO41: JP168.2 U42.2
DO42: JP172.2 U43.2
DO43: JP176.2 U44.2
DO44: JP180.2 U45.2
DO45: JP184.2 U46.2
DO46: JP188.2 U47.2
DO47: JP192.2 U48.2
GND: C1.1 JP1.1 JP2.1 U1.3
GND1: C2.1 JP6.1 JP7.1 U2.3
GND2: C3.1 JP10.1 JP11.1 U3.3
GND3: C4.1 JP14.1 JP16.1 U4.3
GND4: C5.1 JP19.1 JP20.1 U5.3
GND5: C6.1 JP23.1 JP24.1 U6.3
GND6: C7.1 JP27.1 JP28.1 U7.3
GND7: C8.1 JP31.1 JP32.1 U8.3
GND8: C9.1 JP35.1 JP36.1 U9.3
GND9: C10.1 JP39.1 JP40.1 U10.3
GND10: C11.1 JP43.1 JP44.1 U11.3
GND11: C12.1 JP47.1 JP48.1 U12.3
GND12: C13.1 JP51.1 JP52.1 U13.3
GND13: C14.1 JP55.1 JP56.1 U14.3
GND14: C15.1 JP59.1 JP60.1 U15.3
GND15: C16.1 JP63.1 JP64.1 U16.3
GND16: C17.1 JP67.1 JP68.1 U17.3
GND17: C18.1 JP71.1 JP72.1 U18.3
GND18: C19.1 JP75.1 JP76.1 U19.3
GND19: C20.1 JP79.1 JP80.1 U20.3
GND20: C21.1 JP83.1 JP84.1 U21.3
GND21: C22.1 JP87.1 JP88.1 U22.3
GND22: C23.1 JP91.1 JP92.1 U23.3
GND23: C24.1 JP95.1 JP96.1 U24.3
GND24: C25.1 JP99.1 JP100.1 U25.3
GND25: C26.1 JP103.1 JP104.1 U26.3
GND26: C27.1 JP107.1 JP108.1 U27.3
GND27: C28.1 JP111.1 JP112.1 U28.3
GND28: C29.1 JP115.1 JP116.1 U29.3
GND29: C30.1 JP119.1 JP120.1 U30.3
GND30: C31.1 JP123.1 JP124.1 U31.3
GND31: C32.1 JP127.1 JP128.1 U32.3
GND32: C33.1 JP131.1 JP132.1 U33.3
GND33: C34.1 JP135.1 JP136.1 U34.3
GND34: C35.1 JP139.1 JP140.1 U35.3
GND35: C36.1 JP143.1 JP144.1 U36.3
GND36: C37.1 JP147.1 JP148.1 U37.3
GND37: C38.1 JP151.1 JP152.1 U38.3
GND38: C39.1 JP155.1 JP156.1 U39.3
GND39: C40.1 JP159.1 JP160.1 U40.3
GND40: C41.1 JP163.1 JP164.1 U41.3
GND41: C42.1 JP167.1 JP168.1 U42.3
GND42: C43.1 JP171.1 JP172.1 U43.3
GND43: C44.1 JP175.1 JP176.1 U44.3
GND44: C45.1 JP179.1 JP180.1 U45.3
GND45: C46.1 JP183.1 JP184.1 U46.3
GND46: C47.1 JP187.1 JP188.1 U47.3
GND47: C48.1 JP191.1 JP192.1 U48.3
VCC: C1.2 JP1.3 JP2.3 U1.1
VCC1: C2.2 JP6.3 JP7.3 U2.1
VCC2: C3.2 JP10.3 JP11.3 U3.1
VCC3: C4.2 JP14.3 JP16.3 U4.1
VCC4: C5.2 JP19.3 JP20.3 U5.1
VCC5: C6.2 JP23.3 JP24.3 U6.1
VCC6: C7.2 JP27.3 JP28.3 U7.1
VCC7: C8.2 JP31.3 JP32.3 U8.1
VCC8: C9.2 JP35.3 JP36.3 U9.1
VCC9: C10.2 JP39.3 JP40.3 U10.1
VCC10: C11.2 JP43.3 JP44.3 U11.1
VCC11: C12.2 JP47.3 JP48.3 U12.1
VCC12: C13.2 JP51.3 JP52.3 U13.1
VCC13: C14.2 JP55.3 JP56.3 U14.1
VCC14: C15.2 JP59.3 JP60.3 U15.1
VCC15: C16.2 JP63.3 JP64.3 U16.1
VCC16: C17.2 JP67.3 JP68.3 U17.1
VCC17: C18.2 JP71.3 JP72.3 U18.1
VCC18: C19.2 JP75.3 JP76.3 U19.1
VCC19: C20.2 JP79.3 JP80.3 U20.1
VCC20: C21.2 JP83.3 JP84.3 U21.1
VCC21: C22.2 JP87.3 JP88.3 U22.1
VCC22: C23.2 JP91.3 JP92.3 U23.1
VCC23: C24.2 JP95.3 JP96.3 U24.1
VCC24: C25.2 JP99.3 JP100.3 U25.1
VCC25: C26.2 JP103.3 JP104.3 U26.1
VCC26: C27.2 JP107.3 JP108.3 U27.1
VCC27: C28.2 JP111.3 JP112.3 U28.1
VCC28: C29.2 JP115.3 JP116.3 U29.1
VCC29: C30.2 JP119.3 JP120.3 U30.1
VCC30: C31.2 JP123.3 JP124.3 U31.1
VCC31: C32.2 JP127.3 JP128.3 U32.1
VCC32: C33.2 JP131.3 JP132.3 U33.1
VCC33: C34.2 JP135.3 JP136.3 U34.1
VCC34: C35.2 JP139.3 JP140.3 U35.1
VCC35: C36.2 JP143.3 JP144.3 U36.1
VCC36: C37.2 JP147.3 JP148.3 U37.1
VCC37: C38.2 JP151.3 JP152.3 U38.1
VCC38: C39.2 JP155.3 JP156.3 U39.1
VCC39: C40.2 JP159.3 JP160.3 U40.1
VCC40: C41.2 JP163.3 JP164.3 U41.1
VCC41: C42.2 JP167.3 JP168.3 U42.1
VCC42: C43.2 JP171.3 JP172.3 U43.1
VCC43: C44.2 JP175.3 JP176.3 U44.1
VCC44: C45.2 JP179.3 JP180.3 U45.1
VCC45: C46.2 JP183.3 JP184.3 U46.1
VCC46: C47.2 JP187.3 JP188.3 U47.1
VCC47: C48.2 JP191.3 JP192.3 U48.1